# Altium PCB PCB1_powerSup.PcbDoc
Units mm, origin at the board's own origin, x right, y up, seen from the top; angles counter-clockwise.
Board outline 58.04 x 31.75 mm, 2 copper layers (Top Layer, Bottom Layer); 14 components, 7 nets, 32 pads, 4 vias.
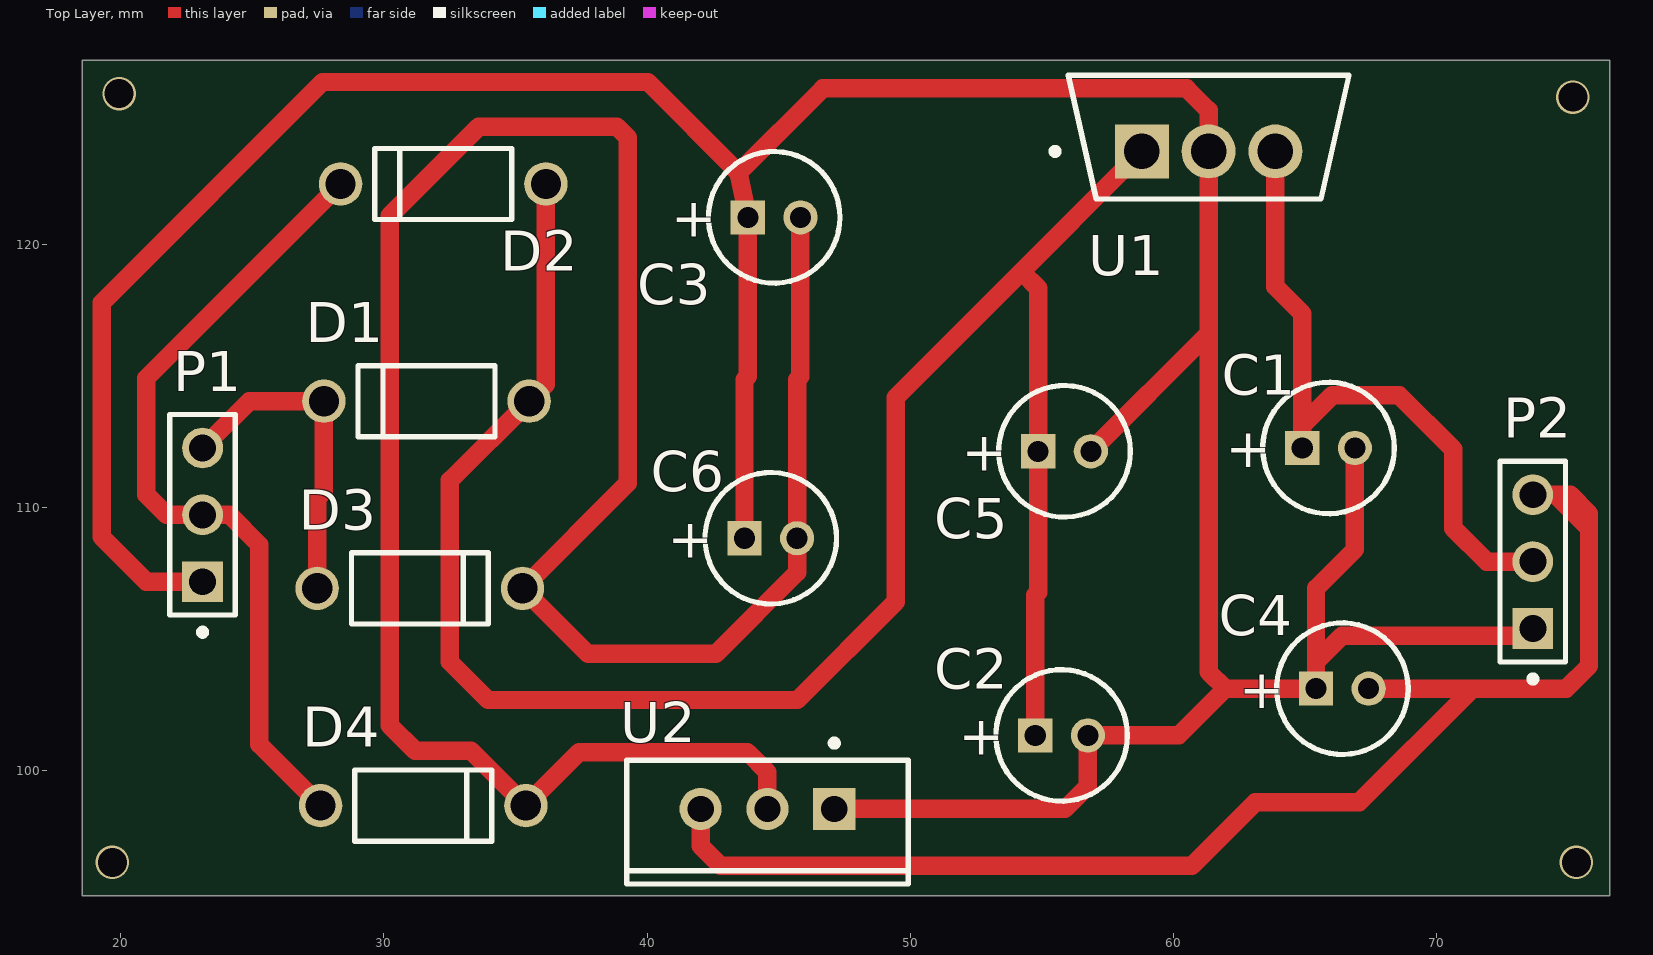
[diagram p0: Top Layer view]
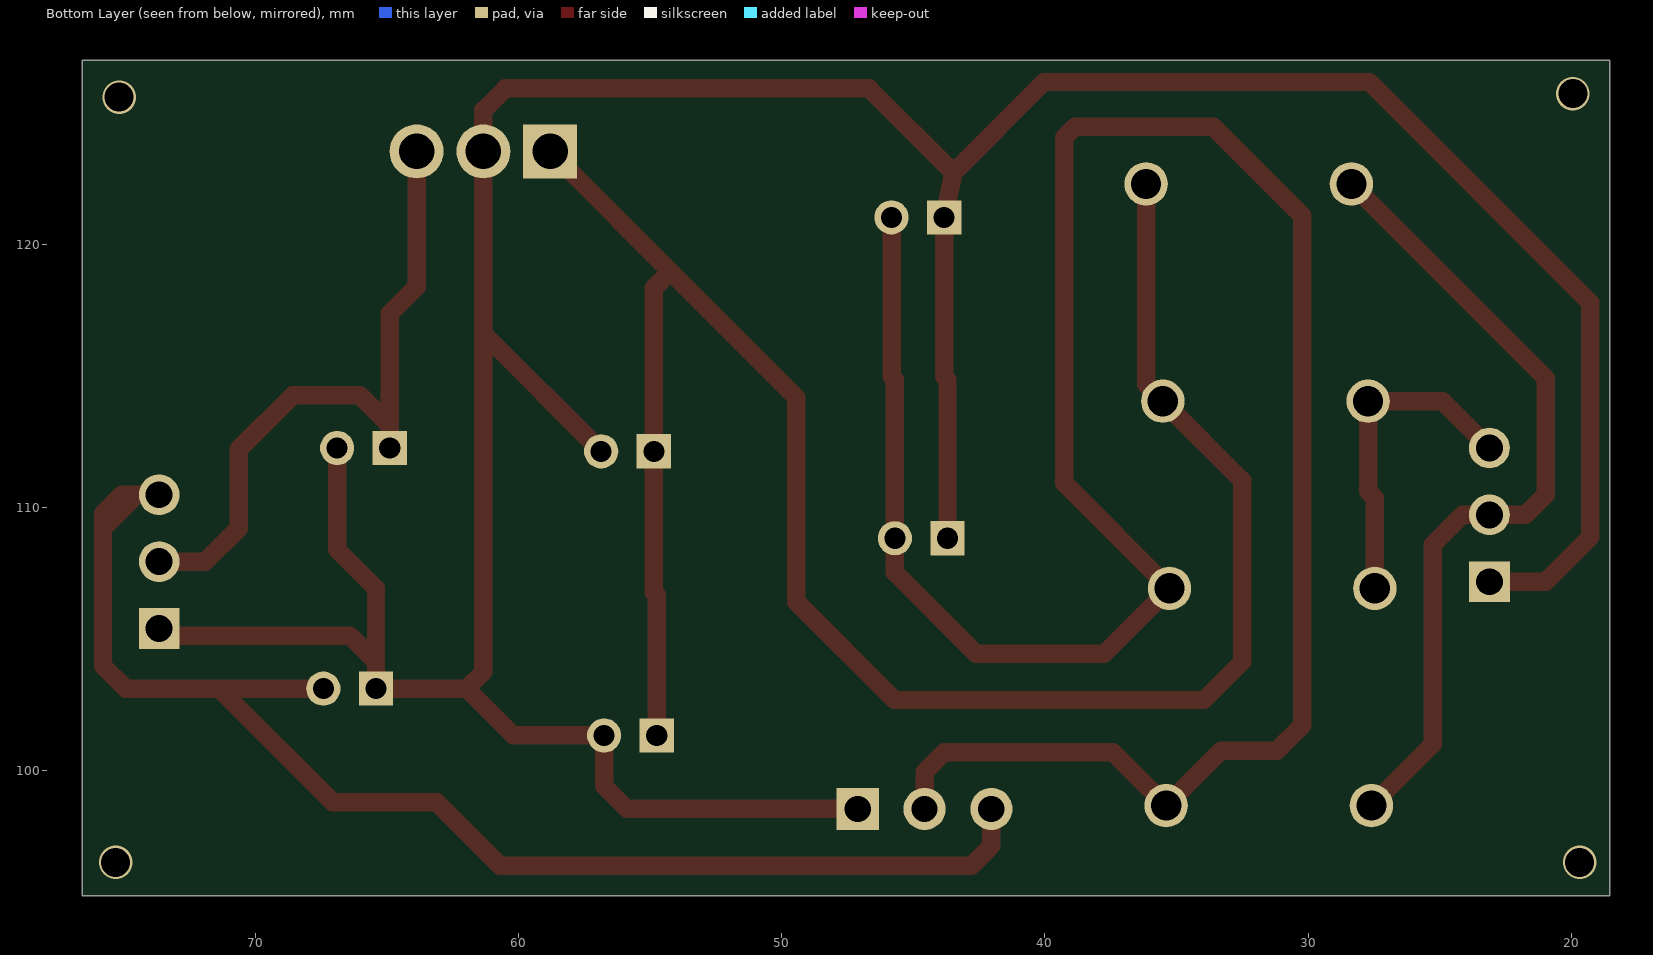
[diagram p1: Bottom Layer view, seen from below]

## Layer stack, top to bottom
Top Solder: solder mask 0.0102, Solder Resist, Dk 3.5
Top Layer: signal copper 0.0356
Dielectric 1: dielectric 0.32, FR-4, Dk 4.8
Bottom Layer: signal copper 0.0356
Bottom Solder: solder mask 0.0102, Solder Resist, Dk 3.5

## Board outline
18.542,95.25 76.581,95.25 76.581,127 18.542,127

## Design rules (kind name [scope] priority, off if disabled: settings)
Clearance [All] p1: gap=1 ignorepadtopadclearanceinfootprint=FALSE
PolygonConnect [All] p1: connectstyle=Relief reliefconductorwidth=0.254 reliefentries=4 polygonreliefangle="90 Angle" airgapwidth=0.254
RoutingLayers [All] p1: top layer_v5=TRUE bottom layer_v5=FALSE
RoutingVias [All] p1: holewidth=0.711 width=1.27 viastyle="Through Hole" minholewidth=0.711 minwidth=1.27 maxholewidth=0.711 maxwidth=1.27
SolderMaskExpansion [All] p1: expansion=0.102 istentingtop=FALSE
Width [All] p1: maxlimit=0.8 minlimit=0.254 preferedwidth=0.7 minimp=50.000000 maximp=50.000000 favimp=50.000000
29 further rules are at their usual default settings.

## Components (designator, comment, footprint, x,y, rotation, side; value= is the part's Value field where it differs from the comment)
C1 "ECA1HM100" CAPPR55-200-1100X500X1200 65.897,112.268 r0 top
C2 "ECA1HM100" CAPPR55-200-1100X500X1200 55.753,101.346 r0 top
C3 "ECA1HM100" CAPPR55-200-1100X500X1200 44.831,121.031 r0 top
C4 "ECA1HM100" CAPPR55-200-1100X500X1200 66.421,103.124 r0 top
C5 "ECA1HM100" CAPPR55-200-1100X500X1200 55.864,112.141 r0 top
C6 "ECA1HM100" CAPPR55-200-1100X500X1200 44.704,108.839 r0 top
D1 "1N4007" FAIR-DO-41-2 31.623,114.046 r180 top
D2 "1N4007" FAIR-DO-41-2 32.258,122.301 r180 top
D3 "1N4007" FAIR-DO-41-2 31.369,106.934 r0 top
D4 "1N4007" FAIR-DO-41-2 31.496,98.679 r0 top
P1 "22-28-4033" MOLX-22-28-4033_V 23.114,109.728 r90 top
P2 "22-28-4033" MOLX-22-28-4033_V 73.66,107.95 r90 top
U1 "LM7812CT" FP-TO220B03-MFG 61.341,124.079 r90 top
U2 "LM7912CT" NDE0003A 44.577,98.552 r180 top

## Footprints (in the part's own frame and the unit in brackets; to place one, negate y for a bottom-side part, rotate by r counter-clockwise, add the part's x,y. Pads: shape width x height; smd on the part's side, far side on the other; paste and mask are expansions set on the pad)
CAPPR55-200-1100X500X1200 [mm] "THD, 2-Leads, Dia 5mm, Body Length 11mm"
  rect 1.3x1.3 hole 0.8: 1(-1,0)
  round 1.3 hole 0.8: 2(1,0)
  silkscreen extent -2.5,-2.5 2.5,2.5, body extent -2.5,-2.5 2.5,2.5, height 12
FAIR-DO-41-2 [mm] "THD, 2-Leads, Body 5.2x2.72mm, Pin Spacing 7.8mm"
  round 1.65 hole 1.15: 1(-3.9,0) 2(3.9,0)
  silkscreen extent -2.6,-1.35 2.6,1.35, body extent -4.29,-1.17 4.29,1.17, height 2.35
FP-TO220B03-MFG [mm]
  rect 2.05x2.05 hole 1.35 paste-1000 mask+0: 1(-0.54,2.535)
  round 2.05 hole 1.35 paste-1000 mask+0: 2(-0.54,0) 3(-0.54,-2.535)
  silkscreen extent -2.35,-5.34 2.35,5.96, body extent -2.45,-5.44 2.45,5.44, height 0.25
MOLX-22-28-4033_V [mm] "THD, 3-Leads, Body 7.62x2.49mm, Pitch 2.54mm"
  rect 1.55x1.55 hole 1.02: 1(-2.54,0)
  round 1.55 hole 1.02: 2(0,0) 3(2.54,0)
  silkscreen extent -4.58,-1.25 3.81,1.25, body extent -3.81,-1.24 3.81,1.24, height 8.38
NDE0003A [mm] "FM, 3-Leads, Body 10.7x4.7mm, Pitch 2.54mm"
  rect 1.6x1.6 hole 1: 1(-2.54,0)
  round 1.6 hole 1: 2(0,0) 3(2.54,0)
  silkscreen extent -5.35,-2.62 5.35,2.85, body extent -5.4,-1.9 5.4,2.9, height 19.4

## Part data
C1 C2 C3 C4 C5 C6: library part CMP-1665-00038-2, "Aluminum Electrolytic Capacitor, 10 uF, +/- 20%, 50 V, -40 to 85 degC, 2-Pin THD, RoHS, Bulk", Capacitance=10uF, Case/Package=Radial, Dielectric Material=Aluminium, Leakage Current=3uA, Manufacturer=Panasonic, Max Operating Temperature=85degC, Min Operating Temperature=-40degC, Package Description="2-Pin Radial Lead, Dia 5 mm, Height 12 mm", Package Quantity=200, Package Reference=CAPPR55-200-1100X500X1200, Ripple Current=65mA, Tolerance=20%, Voltage=50V, Datasheet URL=https://industrial.panasonic.com/cdbs/www-data/pdf/RDF0000/ABA0000C1218.pdf, Datasheet Version="Rev. 05, 10/2016", Diameter=5mm, Dissipation Factor=0.12%, Height=11mm, Height - Seated (Max)=0.472inch, Lead Diameter=0.5mm, Lead Free=LeadFree, Lead Pitch=2mm, Lead/Base Style=Straight, Length=11mm, Life (Hours)=2000Hour, Manufacturer URL=http://www.panasonic.com/, Mount=ThroughHole, Number of Pins=2, Packaging=Bulk, Radiation Hardening=No, REACH SVHC=NoSVHC, Ripple Current (AC)=65mA, RoHSCompliant=true, Termination=Radial, Voltage Rating=50V, Voltage Rating (DC)=50V
D1 D2 D3 D4: library part CMP-004-00007-2, "General Purpose Rectifier, 1.1 V, 1.0 A, -55 to 175 degC, 2-Pin DO-41, RoHS, Tape and Reel", Case/Package=DO-41-2, Forward Current=1A, Forward Voltage=1.1V, Manufacturer=Fairchild, Max Operating Temperature=175°C, Max Surge Current=30A, Min Operating Temperature=-55°C, Package Description="2-Pin Axial Lead, Dia 2.375 mm, Body Length 4.63 mm", Package Quantity=5000, Package Version="Rev. 2, 09/2008", Peak Reverse Current=5uA, Datasheet URL=https://www.fairchildsemi.com/datasheets/1N/1N4007.pdf, Datasheet Version="Rev. 1.1.0, 11/2014", Elements=1, Manufacturer URL=https://www.fairchildsemi.com/, Mounting Technology=TH, Package Reference=DO-41-2, Package URL=http://www.fairchildsemi.com/dwg/DO/DO41A.pdf, Packaging=TapeandReel, Pins=2, RoHS Compliant=True
P1 P2: library part CMP-1676-00001-5, "Male Header, Pitch 2.54 mm, 1 x 3 Position, Height 8.38 mm, Tail Length 3.18 mm, RoHS, Bulk", Colour=Black, Current Rating="4 A", Manufacturer=Molex, Max Operating Temperature="75 degC", Min Operating Temperature="0 degC", Package Quantity=1, Voltage Rating="250 V", ComponentLink1Description="Manufacturer URL", ComponentLink1URL=http://www.molex.com/, ComponentLink2Description=Datasheet, ComponentLink2URL=http://www.molex.com/pdm_docs/sd/022284033_sd.pdf, Contact Finish=Gold, Contact Material=Brass, Contact Plating=Gold, DatasheetVersion="Rev. G, 01/2012", Height="8.38 mm", Lead Pitch="0.1 inch", Length="7.62 mm", Mount="Through Hole", Mounting Technology="Through Hole", PackageDescription="Male Header, Pitch 2.54 mm, 1 x 3 Position, Height 8.38 mm, Tail Length 3.18 mm", PackageReference=22-28-4033, Packaging=Bulk, Pins=3, REACH SVHC=Unknown, RoHSCompliant=true, Rows=1
U1: library part CMP-07128-000015-1, "IC REG LINEAR 12V 1A TO220-3", Dropout Voltage=2V, Manufacturer="ON Semiconductor", Max Supply Voltage=35V, Nominal Supply Current=5.1mA, Output Current=1A, Output Voltage=12V, Package=TO220B03, Temperature="-40°C to +125°C", Temperature Range High=+125°C, Temperature Range Low=-40°C, Accuracy Percentage=4%, Automotive=No, Category=IC, ComponentLink2Description=Datasheet, ComponentLink2URL=https://www.mouser.in/datasheet/2/308/LM7812-1125088.pdf, Device Class L1="Integrated Circuits (ICs)", Device Class L2="Power Management ICs", Device Class L3="Voltage Regulators - Linear", Digikey Description="IC REG LINEAR 12V 1A TO220-3", Height=20.4mm, Ipc Land Pattern Name=TO-220, Lead Free=Yes, Manufacturer Part Number=LM7812CT, Number Of Outputs=1, Obsolete Part=true, Octopart=https://octopart.com/lm7812ct-on+semiconductor-14383031, Output Type=Fixed, RoHS=TRUE, Standoff Height=2.7mm
U2: library part CMP-0062-02472-3, "3-Terminal Negative Regulator, 3-pin TO-220", Manufacturer="Texas Instruments", PackageTopMarking=NSUZXYTTE#*LM7912CT, PowerWise=N, ComponentLink1Description="Datasheet URL", ComponentLink1URL=http://www.ti.com/general/docs/lit/getliterature.tsp?genericPartNumber=LM7912&fileType=pdf, CompType="LDO IC", PackageDescription="TO-220, Molded, 3 Lead, Straight", PackageReference=NDE0003A, PinCount=3, RoHS=N

## Via types
v1: diameter 1.27, hole 1.1, Top Layer to Bottom Layer, 4 vias

## Nets (pads, with @x,y where several pads share a name; then routed paths per layer and width w, separated by ;. In a path a pad name is that pad's centre, name@x,y a point inside that pad or via, vN(x,y) a via of type N, cw(c..) or ccw(c..) an arc to the next point about the centre after c; other vN are vias at no path point)
GND: C1.2 C2.2 C3.1 C4.1 C5.2 C6.1 P1.1 P2.1 U1.2 U2.1 | length 145.6
  Top Layer w0.7: P1.1 20.98,107.188 19.279,108.89 19.279,117.78 27.675,126.176 40.033,126.176 43.481,122.729 ; C6.1 43.704,114.859 43.831,114.986 C3.1 43.481,122.729 ; U2.1 55.88,98.552 56.753,99.425 C2.2 60.198,101.346 61.976,103.124 ; C5.2 61.341,116.618 ; C1.2 66.897,108.41 65.421,106.934 65.421,104.14 ; P2.1 73.66,105.131 66.412,105.131 65.421,104.14 ; 43.481,122.729 46.685,125.933 60.503,125.933 61.341,125.095 U1.2 61.341,116.618 ; 61.341,116.618 61.341,103.759 61.976,103.124 ; 61.976,103.124 C4.1 ; C4.1 65.421,104.14 ; C4.1 65.421,104.14
NetC1_1: C1.1 P2.2 U1.3 | length 26.2
  Top Layer w0.7: U1.3 63.876,118.394 64.897,117.373 64.897,113.132 ; P2.2 71.907,107.95 70.637,109.22 70.637,112.217 68.58,114.275 66.04,114.275 64.897,113.132 ; 64.897,113.132 C1.1 64.897,113.132
NetC2_1: C2.1 C5.1 D1.1 D2.1 U1.1 | length 79
  Top Layer w0.7: D2.1 36.158,114.681 D1.1 32.512,111.035 32.512,104.14 33.96,102.692 45.72,102.692 49.454,106.426 49.454,114.187 54.247,118.981 ; C2.1 54.753,106.68 54.864,106.791 C5.1 54.864,118.339 54.247,118.955 54.247,118.981 ; 54.247,118.981 U1.1@58.131,122.864 ; U1.1@58.131,122.864 58.131,123.539 U1.1 U1.1@58.131,122.864
NetC3_2: C3.2 C6.2 D3.2 D4.2 U2.2 | length 93.2
  Top Layer w0.7: U2.2 44.577,99.949 43.815,100.711 37.428,100.711 D4.2 33.313,100.762 31.191,100.762 30.226,101.727 30.226,121.093 33.609,124.476 38.858,124.476 39.268,124.066 39.268,110.933 D3.2 37.758,104.445 42.612,104.445 45.704,107.537 C6.2 45.704,114.859 45.831,114.986 C3.2
NetC4_2: C4.2 P2.3 U2.3 | length 52.4
  Top Layer w0.7: U2.3 42.037,97.155 42.799,96.393 60.706,96.393 63.119,98.806 67.056,98.806 71.247,102.997 ; C4.2 71.247,103.124 74.93,103.124 75.794,103.988 75.794,109.22 ; P2.3 74.524,110.49 ; 74.524,110.49 75.082,110.49 75.794,109.779 75.794,109.22 ; 74.524,110.49 75.794,109.22
NetD1_2: D1.2 D3.1 P1.3 | length 12.6
  Top Layer w0.7: P1.3 24.892,114.046 D1.2 27.723,110.617 27.469,110.363 D3.1
NetD2_2: D2.2 D4.1 P1.2 | length 30.8
  Top Layer w0.7: D4.1 25.273,101.002 25.273,108.585 24.13,109.728 P1.2 21.742,109.728 20.98,110.49 20.98,114.923 D2.2
copper on no net:
  other v1: 19.685,96.52 75.311,96.52 75.184,125.603 19.939,125.73

## Text inside footprints (layer, text, board x,y; h text height)
C1: Top Overlay "+" at 61.989,111.531 h1.5
C2: Top Overlay "+" at 51.845,100.609 h1.5
C3: Top Overlay "+" at 40.923,120.294 h1.5
C4: Top Overlay "+" at 62.513,102.387 h1.5
C5: Top Overlay "+" at 51.956,111.404 h1.5
C6: Top Overlay "+" at 40.796,108.102 h1.5